# EAGLE board Cansat-2023-3 (EAGLE 9.4.2)
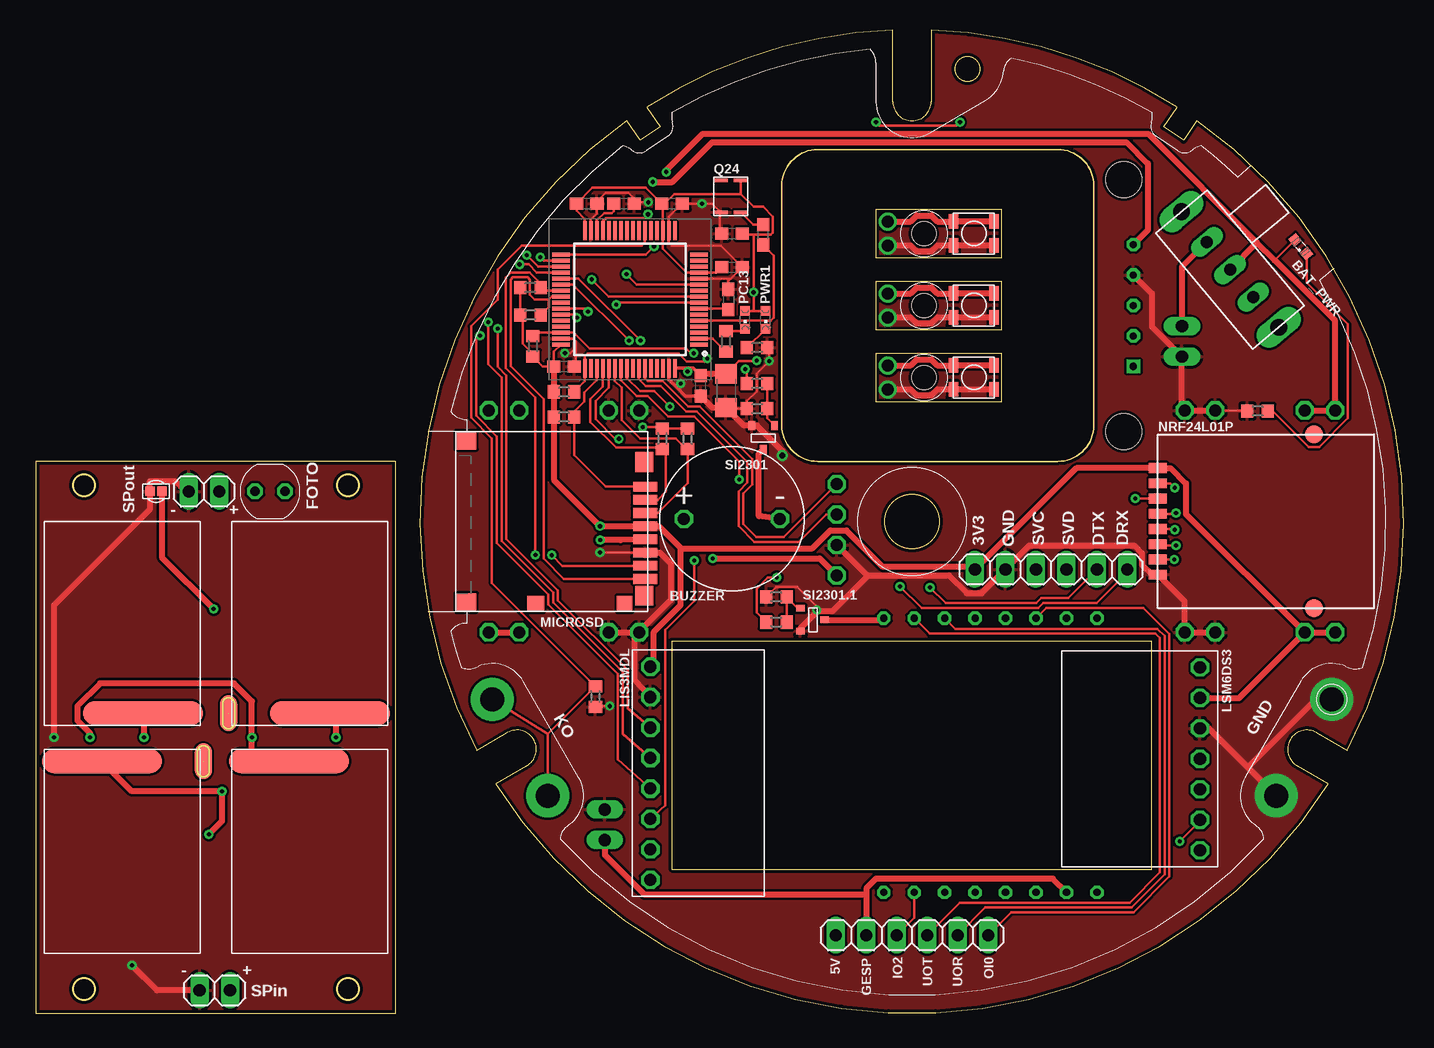
[diagram p0: board, top side]
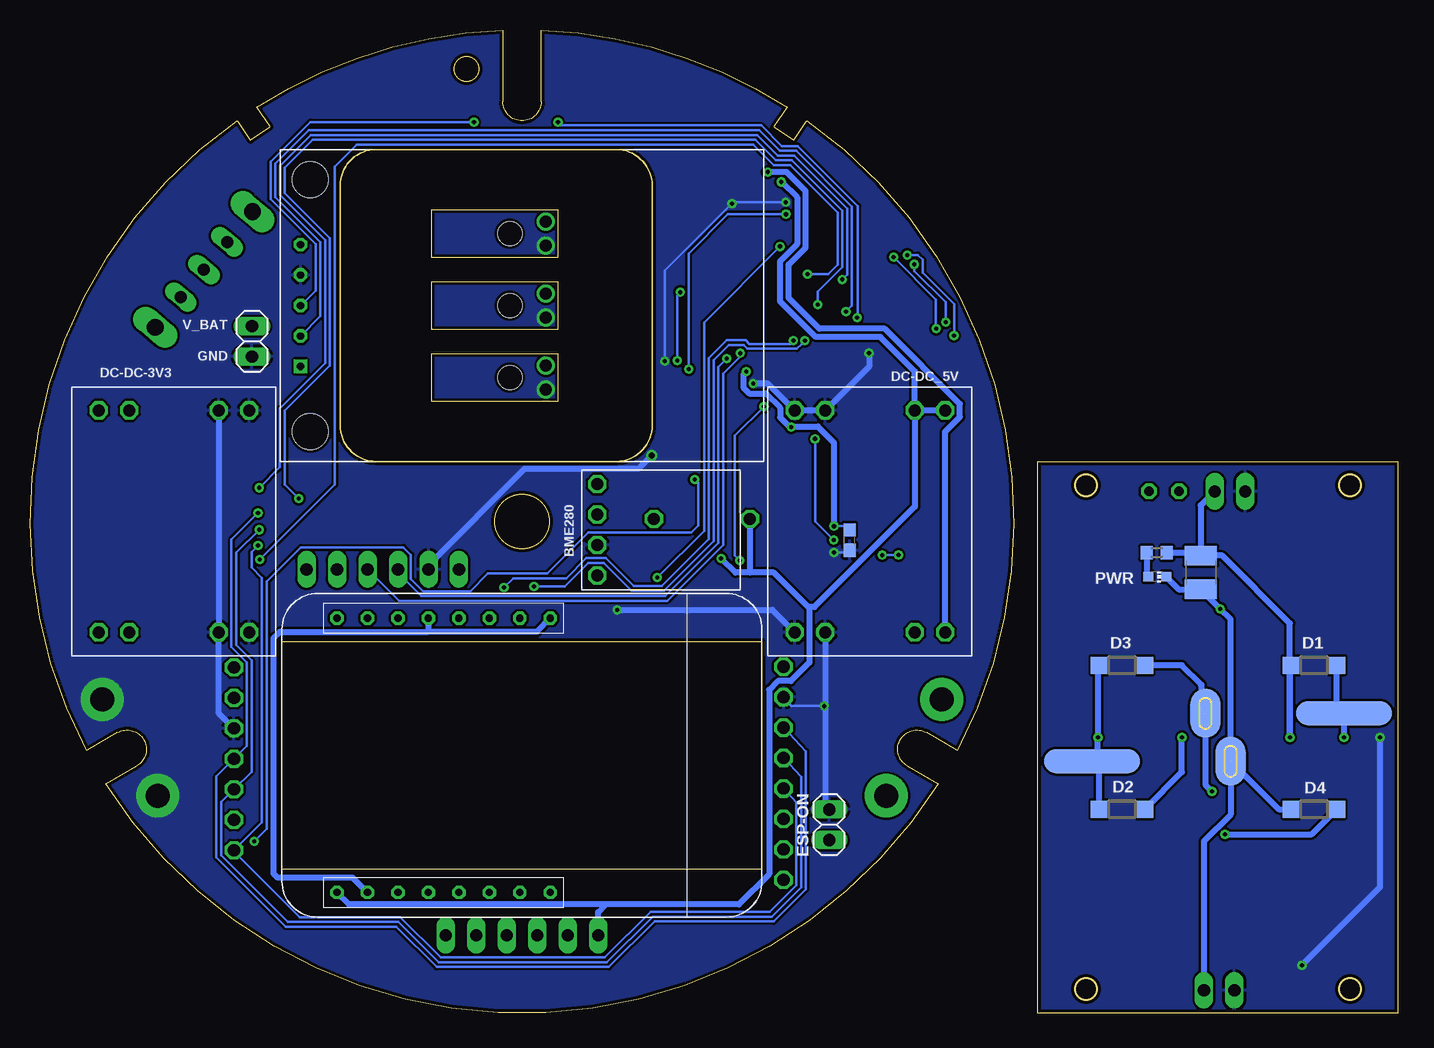
[diagram p1: board, bottom side, seen from below]

Size 114 x 81.97 mm. Coordinates in mm from the lower left corner, seen from the top.
Outline: 0,0 30,0 30,46 0,46 0,0
Outline: 80.5,51 80.5,55 70,55 70,51 80.5,51
Outline: 80.5,63 80.5,67 70,67 70,63 80.5,63
Outline: 80.5,57 80.5,61 70,61 70,57 80.5,57
Outline: 52.02,73.89 50.36,72.77 49.25,74.42 arc82 36.72,21.9 39.29,23.39 arc-180 40.89,20.61 38.32,19.13 arc116 107.68,19.13 105.11,20.61 arc-180 106.71,23.39 109.28,21.9 arc82 96.75,74.42 95.64,72.77 93.98,73.89 95.09,75.54 arc30 74.6,81.97 74.6,76 arc-180 71.4,76 71.4,81.97 arc30 50.91,75.54 52.02,73.89
Outline: 53,12 93,12 93,31 53,31 53,12
Outline: circle at 4,2 radius 0.9
Outline: circle at 26,2 radius 0.9
Outline: circle at 26,44 radius 0.9
Outline: circle at 4,44 radius 0.9
Outline: circle at 73,41 radius 2.25
Outline: circle at 77.63,78.72 radius 1
Copper layers (1*16): Top 0.035mm / dielectric 1.5mm / Bottom 0.035mm
Design rules "default *": minimum track width 0.2mm, minimum drill 0.35mm, track to track 0.2mm, track to pad 0.2mm, pad to pad 0.2mm, via to via 0.2mm, smd to smd 0.2mm, copper to edge 0.25mm, drill to drill 0.1mm, minimum pad ring 10mil, minimum via ring 8mil, stop-mask expansion 3mil, vias tented up to drill 0mil, thermal gap 10mil
Holes 2 mm at 74,53 74,65 74,59

## Footprints (pad centres in the part's own frame; a part is rotated, then mirrored left to right if it is on the bottom)
SML0603 = smd 0.8 x 0.8: A 0.75,0; C -0.75,0
BME280-PINS-ONLY = drill 1.016 octagon: P$1 -3.81,5.33; P$2 -1.27,5.33; P$3 1.27,5.33; P$4 3.81,5.33
BUZZER-S8R12 = drill 1 octagon: P$1 -4,0; P$2 4,0
C1210 = smd 1.6 x 2.7: 1 -1.4,0; 2 1.4,0
C0603 = smd 1.1 x 1: 1 -0.85,0; 2 0.85,0
C1206 = smd 1.6 x 1.8: 1 -1.4,0; 2 1.4,0
SOD123 = smd 1.4 x 1.4: A 1.9,0; C -1.9,0
MP1584-B = drill 1.016 octagon: P$1 1.95,2.23; P$2 1.95,4.77; P$3 1.95,12.23; P$4 1.95,14.77; P$5 20.45,14.77; P$6 20.45,12.23; P$7 20.45,4.77; P$8 20.45,2.23
ESP32-CAM = drill 0.6 octagon: P$1 -11.43,-15.42; P$2 -11.43,-12.88; P$3 -11.43,-10.34; P$4 -11.43,-7.8; P$5 -11.43,-5.26; P$6 -11.43,-2.72; P$7 -11.43,-0.18; P$8 -11.43,2.36; P$9 11.43,-15.42; P$10 11.43,-12.88; P$11 11.43,-10.34; P$12 11.43,-7.8; P$13 11.43,-5.26; P$14 11.43,-2.72; P$15 11.43,-0.18; P$16 11.43,2.36
1X02 = drill 1.016 long: 1 -1.27,0; 2 1.27,0
VT93N1-VERT = drill 0.8 octagon: P$1 -1.25,0; P$2 1.25,0
1X06 = drill 1.016 long: 1 -6.35,0; 2 -3.81,0; 3 -1.27,0; 4 1.27,0; 5 3.81,0; 6 6.35,0
LIS3MDL-CGMSU-NB2023-1 = drill 1.016 octagon: P$1 -8.89,-4; P$2 -6.35,-4; P$3 -3.81,-4; P$4 -1.27,-4; P$5 1.27,-4; P$6 3.81,-4; P$7 6.35,-4; P$8 8.89,-4
LSM6DS3-GY-NB2023-1 = drill 1.016 octagon: P$1 -7.62,-5; P$2 -5.08,-5; P$3 -2.54,-5; P$4 0,-5; P$5 2.54,-5; P$6 5.08,-5; P$7 7.62,-5
SD = smd 0.8 x 2: CLK 6,-15.77; CMD 8.2,-15.77; DAT0 3.8,-15.77; DAT1 2.7,-15.77; DAT2 10.4,-15.77; DAT3 9.3,-15.77; VDD 7.1,-15.77; VSS 4.9,-15.77 | smd 1.5 x 1.7: P$9 0.75,-0.85; P$13 14.25,-0.85 | smd 1.6 x 1.5: P$10 1.3,-15.7 | smd 1.29 x 1.3: P$11 0.645,-14.05 | smd 1.29 x 1.4: P$12 0.645,-6.65 | smd 1.7 x 1.5: P$14 12.45,-15.7
NRF24L01_ML01SP4 = smd 1.5 x 0.8: P$1 -9,4.445; P$2 -9,3.175; P$3 -9,1.905; P$4 -9,0.635; P$5 -9,-0.635; P$6 -9,-1.905; P$7 -9,-3.175; P$8 -9,-4.445 | smd 1.5 x 1.5: P$9 4,7.25; P$10 4,-7.25
CHIPLED_0603 = smd 0.8 x 0.8: A 0,-0.75; C 0,0.75
CHIP-LED0603 = smd 0.8 x 0.8: A 0,-0.75; C 0,0.75
Q24 = smd 0.3 x 1.2: P$1 -1.325,-0.85; P$2 1.325,-0.85; P$3 1.325,0.85; P$4 -1.325,0.85
R0603 = smd 1 x 1.1: 1 -0.85,0; 2 0.85,0
SWITCH_SK-12F14 = drill 1.4 long: P$1 0.006,6.3; P$2 0.006,-6.3 | drill 1 long: P$3 0.006,0; P$4 0.006,-3; P$5 0.006,3
SOT23-3 = smd 0.56 x 0.73: 1 -0.95,-1; 2 0.95,-1; 3 0,1
QFP50P1200X1200X160-64N = smd 1.475 x 0.27: 1 -5.738,3.75; 2 -5.738,3.25; 3 -5.738,2.75; 4 -5.738,2.25; 5 -5.738,1.75; 6 -5.738,1.25; 7 -5.738,0.75; 8 -5.738,0.25; 9 -5.738,-0.25; 10 -5.738,-0.75; 11 -5.738,-1.25; 12 -5.738,-1.75; 13 -5.738,-2.25; 14 -5.738,-2.75; 15 -5.738,-3.25; 16 -5.738,-3.75; 33 5.738,-3.75; 34 5.738,-3.25; 35 5.738,-2.75; 36 5.738,-2.25; 37 5.738,-1.75; 38 5.738,-1.25; 39 5.738,-0.75; 40 5.738,-0.25; 41 5.738,0.25; 42 5.738,0.75; 43 5.738,1.25; 44 5.738,1.75; 45 5.738,2.25; 46 5.738,2.75; 47 5.738,3.25; 48 5.738,3.75 | smd 0.27 x 1.475: 17 -3.75,-5.738; 18 -3.25,-5.738; 19 -2.75,-5.738; 20 -2.25,-5.738; 21 -1.75,-5.738; 22 -1.25,-5.738; 23 -0.75,-5.738; 24 -0.25,-5.738; 25 0.25,-5.738; 26 0.75,-5.738; 27 1.25,-5.738; 28 1.75,-5.738; 29 2.25,-5.738; 30 2.75,-5.738; 31 3.25,-5.738; 32 3.75,-5.738; 49 3.75,5.738; 50 3.25,5.738; 51 2.75,5.738; 52 2.25,5.738; 53 1.75,5.738; 54 1.25,5.738; 55 0.75,5.738; 56 0.25,5.738; 57 -0.25,5.738; 58 -0.75,5.738; 59 -1.25,5.738; 60 -1.75,5.738; 61 -2.25,5.738; 62 -2.75,5.738; 63 -3.25,5.738; 64 -3.75,5.738
SOLAR_1-2 = smd 2 x 10: IN-2 -7.5,-1.7 | smd 2 x 8 bottom: OUT -7.5,2.7
SOLAR_0-2 = smd 2 x 10: IN-2 -7.5,-1.7 | smd 4.1 x 2.5 bottom: OUT-2 -7.5,6.75 | smd 3 x 1.4: OUT-21 -7.5,6.75
GPS_NEO7M_W-PPS_&_ANT = drill 0.6 octagon: GND -18.45,2.54; RX -18.45,-2.54; TX -18.45,0; VCC -18.45,5.08 | drill 0.6 square: PPS -18.45,-5.08 | hole 3: -17.65,10.5; -17.65,-10.5
BTN-VS-CUT = smd 0.8 x 1.2: P$1 -1.7,1; P$2 1.7,1; P$3 1.7,-1; P$4 -1.7,-1
VIAS-CONNECT = smd 0.8 x 0.8: 1 -0.5,0; 2 0.5,0

## Placement (x,y rotation side)
BAT_PWR  [SML0603]  105.4,63.9 130 top
BME280  BME280BME280-PINS-ONLY  [BME280-PINS-ONLY]  61.4,40.3 90 bottom
BUZZER  BUZZERS8R6  [BUZZER-S8R12]  58,41.2 0 top
C1  47u  [C1210]  16.44,36.74 270 bottom
C2  100nF  [C0603]  44,53.9 180 top
C3  10uF  [C1206]  57.5,51.9 270 top
C4  100nF  [C0603]  55.4,52.3 90 top
C5  100nF  [C0603]  58,62.2 0 top
C6  100nF  [C0603]  53,67.5 0 top
C7  100nF  [C0603]  45.9,67.5 0 top
C8  100nF  [C0603]  45.7,39.44 90 bottom
C9  1nF  [C0603]  60.6,64.9 90 top
C10  10nF  [C0603]  58,65 0 top
C11  100nf  [C0603]  57.7,59.5 270 top
C12  4.7uf  [C0603]  49,67.5 0 top
D1  MBR0520LT  [SOD123]  7,29 180 bottom
D2  MBR0520LT  [SOD123]  23,17 0 bottom
D3  MBR0520LT  [SOD123]  23,29 180 bottom
D4  MBR0520LT  [SOD123]  7,17 0 bottom
DC-DC-3V3  MP1584-B  [MP1584-B]  110.5,52.2 270 bottom
DC-DC_5V  MP1584-B  [MP1584-B]  35.5,29.8 90 bottom
ESP32-CAM  ESP32-CAM  [ESP32-CAM]  73,21.5 90 top
ESP-ON  [1X02]  47.4,15.7 270 bottom
FOTO  VT93N1VERT  [VT93N1-VERT]  19.5,43.5 0 top
JP1  [1X02]  14,43.5 0 top
JP2  [1X06]  84.6,37 180 top
JP3  [1X02]  95.5,56 270 bottom
JP4  [1X06]  73,6.5 0 top
LIS3MDL  LIS3MDL-CJMCUбез_отв.  [LIS3MDL-CGMSU-NB2023-1]  55.2,20 270 top
LSM6DS3  LSM6DS3-GY-NB2023Без_отв.  [LSM6DS3-GY-NB2023-1]  92,21.2 90 top
MICROSD  SD  [SD]  35,33.5 90 top
NRF24L01P  NRF24L01_ML01SP4  [NRF24L01_ML01SP4]  102.5,41 0 top
PC13  [CHIPLED_0603]  59.1,57.8 180 top
PWR  [CHIP-LED0603]  20.06,36.37 270 bottom
PWR1  [CHIPLED_0603]  60.8,57.8 180 top
Q24  Q24  [Q24]  57.9,68.1 270 top
R1  2k7  [R0603]  20.1,38.39 180 bottom
R2  3k3  [R0603]  44,49.7 180 top
R3  2k  [R0603]  60.1,55.5 180 top
R4  2k  [R0603]  57.5,56 90 top
R5  10k  [R0603]  41.4,55.6 270 top
R6  10k  [R0603]  44,51.8 180 top
R7  3k3  [R0603]  52.2,47.9 90 top
R8  3k3  [R0603]  54.3,47.9 90 top
R9  3k3  [R0603]  41.2,60.5 180 top
R10  3k3  [R0603]  41.2,58.2 180 top
R11  5K1  [R0603]  101.8,50.2 180 top
R30  100R  [R0603]  60.1,52.5 0 top
R31  10k  [R0603]  60.1,50.4 180 top
R32  10k  [R0603]  46.62,26.4 90 top
R33  10k  [R0603]  61.7,34.7 0 top
R34  100R  [R0603]  61.7,32.6 0 top
S1  [SWITCH_SK-12F14]  99.5,62 40 top
SI2301  MOSFET-N  [SOT23-3]  60.6,48 180 top
SI2301.1  MOSFET-N  [SOT23-3]  64.7,32.8 270 top
SP-OUT  [1X02]  14.9,1.9 180 top
STM32F0401  STM32F401RCT6  [QFP50P1200X1200X160-64N]  49.5,59.5 180 top
U$1  SOLAR-2_1  [SOLAR_1-2]  7.2,32.5 90 top
U$2  SOLAR-2_1  [SOLAR_1-2]  22.8,13.5 270 top
U$3  SOLAR-2_0  [SOLAR_0-2]  22.8,32.5 90 top
U$4  SOLAR-2_0  [SOLAR_0-2]  7.2,13.5 270 top
U$5  GPS_NEO7M_W-PPS  [GPS_NEO7M_W-PPS_&_ANT]  73,59 0 bottom
U$6  BTN_VERY_SMALLCUT  [BTN-VS-CUT]  78.15,53 180 top
U$7  [VIAS-CONNECT]  10,43.5 180 top
U$8  BTN_VERY_SMALLCUT  [BTN-VS-CUT]  78.15,65 180 top
U$9  BTN_VERY_SMALLCUT  [BTN-VS-CUT]  78.15,59 180 top

## Library data of the parts
BAT_PWR PC13 PWR PWR1 = led
BME280 BUZZER DC-DC-3V3 DC-DC_5V ESP32-CAM LIS3MDL LSM6DS3 MICROSD NRF24L01P S1 SI2301 SI2301.1 U$5 U$6 U$8 U$9 = NEON-BLADE-2023
C1-C12 = rcl; SPICEPREFIX: C
D1-D4 = diode
ESP-ON JP1-JP4 SP-OUT = pinhead
FOTO U$1-U$4 U$7 = KNPN-2023
Q24 = CanCubeSat
R1-R11 R30-R34 = rcl; SPICEPREFIX: R
STM32F0401 = STM32F401RCT6; ARROW_PART_NUMBER: STM32F401RCT6; ARROW_PRICE-STOCK: https://www.arrow.com/en/products/stm32f401rct6/stmicroelectronics?region=nac; DESCRIPTION: 32-Bit MCU Cortex-M4 256KB 1.8V LQFP64 STMicroelectronics STM32F401RCT6, 32bit ARM Cortex M4 MCU, 84MHz, 256 kB Flash, 64-Pin LQFP; HEIGHT: 1.6mm; MANUFACTURER_NAME: STMicroelectronics; MANUFACTURER_PART_NUMBER: STM32F401RCT6; MOUSER_PART_NUMBER: 511-STM32F401RCT6; MOUSER_PRICE-STOCK: https://www.mouser.co.uk/ProductDetail/STMicroelectronics/STM32F401RCT6?qs=DqCdCwOw4%2F4JITyspz8omA%3D%3D

## Nets
3V3: C2.2 C3.1 C4.2 C5.1 C6.1 C7.1 C8.2 C10.2 DC-DC-3V3.P$7 DC-DC-3V3.P$8 JP2.6 LIS3MDL.P$1 LSM6DS3.P$6 MICROSD.VDD NRF24L01P.P$1 PC13.A PWR1.A Q24.P$4 R2.2 R5.2 R6.2 R7.2 R8.2 R9.2 R10.2 STM32F0401.13 STM32F0401.19 STM32F0401.32 STM32F0401.48 STM32F0401.64
5V: BME280.P$1 BUZZER.P$1 DC-DC_5V.P$7 DC-DC_5V.P$8 ESP32-CAM.P$1 JP4.1 U$5.VCC
BASS_BUZZER: R30.1 STM32F0401.29
CE_NRF: NRF24L01P.P$2 STM32F0401.9
CS_LIS: LIS3MDL.P$6 STM32F0401.56
CS_LSM: LSM6DS3.P$2 STM32F0401.55
CS_NRF: NRF24L01P.P$3 STM32F0401.8
DBG_RX: JP2.1 STM32F0401.38
DBG_TX: JP2.2 STM32F0401.37
ESP_EN: R34.1 STM32F0401.33
GND: BME280.P$2 C2.1 C3.2 C4.1 C5.2 C6.2 C7.2 C8.1 C10.1 C11.1 C12.2 DC-DC-3V3.P$3 DC-DC-3V3.P$4 DC-DC-3V3.P$5 DC-DC-3V3.P$6 DC-DC_5V.P$3 DC-DC_5V.P$4 DC-DC_5V.P$5 DC-DC_5V.P$6 ESP-ON.1 JP2.5 JP3.2 LIS3MDL.P$2 LSM6DS3.P$5 MICROSD.VSS NRF24L01P.P$8 Q24.P$2 R3.1 R11.2 R31.2 R32.1 R33.1 SI2301.1.2 SI2301.2 STM32F0401.12 STM32F0401.18 STM32F0401.31 STM32F0401.47 STM32F0401.63 U$5.GND
GND_ESP: ESP32-CAM.P$2 ESP32-CAM.P$12 ESP32-CAM.P$16 ESP-ON.2 JP4.2 SI2301.1.3
GPS_RX: STM32F0401.43 U$5.TX
GPS_TX: STM32F0401.42 U$5.RX
IO0: ESP32-CAM.P$11 JP4.6
IO2: ESP32-CAM.P$7 JP4.3
KO: R32.2 STM32F0401.22
LED: R4.1 STM32F0401.2
MISO: LIS3MDL.P$5 LSM6DS3.P$1 NRF24L01P.P$6 STM32F0401.35
MOSI: LIS3MDL.P$4 LSM6DS3.P$3 NRF24L01P.P$5 STM32F0401.36
N$1: D1.C D2.A U$1.OUT U$2.IN-2
N$2: D2.C D3.A U$2.OUT U$3.IN-2
N$3: D3.C D4.A U$3.OUT-2 U$3.OUT-21 U$4.IN-2
N$4: PWR.A R1.2
N$5: R33.2 R34.2 SI2301.1.1
N$6: R30.2 R31.1 SI2301.1
N$7: JP3.1 S1.P$5
N$8: BAT_PWR.C R11.1
N$10: C9.2 Q24.P$3
N$12: C12.1 STM32F0401.30
N$20: BUZZER.P$2 SI2301.3
N$36: PWR1.C R3.2
N$37: PC13.C R4.2
NRF_IRQ: NRF24L01P.P$7 STM32F0401.11
NRST: C11.2 STM32F0401.7
P1: U$6.P$1 U$6.P$2
P2: U$6.P$3 U$6.P$4
P3: U$8.P$1 U$8.P$2
P4: U$8.P$3 U$8.P$4
P5: U$9.P$1 U$9.P$2
P6: U$9.P$3 U$9.P$4
SCK: LIS3MDL.P$3 LSM6DS3.P$4 NRF24L01P.P$4 STM32F0401.34
SCL: BME280.P$3 STM32F0401.58
SDA: BME280.P$4 STM32F0401.59
SDIO_CK: MICROSD.CLK STM32F0401.53
SDIO_CMD: MICROSD.CMD R8.1 STM32F0401.54
SDIO_DAT0: MICROSD.DAT0 R9.1 STM32F0401.39
SDIO_DAT1: MICROSD.DAT1 R10.1 STM32F0401.40
SDIO_DAT2: MICROSD.DAT2 R2.1 STM32F0401.51
SDIO_DAT3: MICROSD.DAT3 R7.1 STM32F0401.52
SP+: C1.1 D1.A JP1.2 R1.1 U$1.IN-2
SP+-: C1.2 D4.C PWR.C SP-OUT.1 U$4.OUT-2 U$4.OUT-21 U$7.1
SP-: JP1.1 SP-OUT.2 U$7.2
SVC: JP2.4 R6.1 STM32F0401.49
SVD: JP2.3 R5.1 STM32F0401.46
TCXO: C9.1 STM32F0401.5
UOR: ESP32-CAM.P$14 JP4.5
UOT: ESP32-CAM.P$15 JP4.4
V_BAT: BAT_PWR.A DC-DC-3V3.P$1 DC-DC-3V3.P$2 DC-DC_5V.P$1 DC-DC_5V.P$2 S1.P$3

## Tracks (layer width: path | path; a pad name or v marks a point on that pad's centre or on a via)
3V3  (via drill 0.35)
  Top 0.2: C6.1 50.83,68.83 46.38,68.83 C7.1 45.05,66.9 45.75,66.2 STM32F0401.32 | C6.1 52.25,67.4 STM32F0401.19 52.25,63.75 54.25,61.75 STM32F0401.13 56.7,61.75 C5.1 | C6.1 52.38,67.5 53.18,68.3 58.73,68.3 58.75,68.28 | 59.8,64.9 61.22,64.9 61.4,65.08 61.4,66.42 60.6,67.22 59.8,67.22 58.75,68.28 | PC13.A 59.8,58.55 | 59.8,58.55 PWR1.A | 59.8,58.55 v59.8,60.1 59.8,64.9 | R9.2 R10.2 40.55,58 40.55,55.83 41.4,54.98 R5.2 42.25,53.9 C2.2 43.15,55.14 STM32F0401.48 | Q24.P$4 58.75,68.28 | v50.55,48.86 52.09,48.86 R7.2 R8.2 | v60.07,54.4 60.05,54.38 58.58,54.38 C3.1 | 59.8,64.9 58.95,64.9 C10.2
  Top 0.28: STM32F0401.64 54.3,53.76 | 54.3,53.76 54.79,53.76 C4.2 | v54.3,53.5 54.3,53.76
  Top 0.5: DC-DC-3V3.P$7 DC-DC-3V3.P$8 | DC-DC-3V3.P$7 95.83,41.6 95.83,44.17 94.56,45.45 NRF24L01P.P$1 86.69,45.45 JP2.6 78.05,37.2 70.57,37.2 67.53,40.24 66.2,40.24 64.7,38.74 53.76,38.74 53.7,38.81 | C2.2 R6.2 R2.2 43.15,44.45 v47,40.6 MICROSD.VDD 51.91,40.6 53.7,38.81 | C3.1 55.55,53.3 C4.2 | 53.7,38.81 53.7,34 51.48,31.78 51.48,29.17 LIS3MDL.P$1 | DC-DC-3V3.P$7 100.26,26.28 LSM6DS3.P$6
  Bottom 0.2: v60.07,54.4 60.07,59.83 v59.8,60.1 | C8.2 46.01,40.6 v47,40.6 | v50.55,48.86 50.6,48.91
  Bottom 0.5: v54.3,53.5 54.55,53.25 54.55,52.16 54.06,51.67 52.68,51.67 51.48,50.47 51.48,49.67 50.72,48.91 50.6,48.91 48.34,48.91 47,47.57 v47,40.6
5V  (via drill 0.35)
  Top 0.5: v51.4,69.3 53.04,69.3 56.35,72.61 90.88,72.61 92.66,70.83 92.66,65.29 U$5.VCC | v56.41,37.91 65.31,37.91 BME280.P$1
  Bottom 0.5: DC-DC_5V.P$8 DC-DC_5V.P$7 | v51.4,69.3 51.35,69.3 50.07,68.02 50.07,64.1 51.5,62.67 51.5,59.35 48.51,56.37 43.14,56.37 40.27,53.5 DC-DC_5V.P$7 | ESP32-CAM.P$1 87.42,9.07 66,9.07 | 66,9.07 54.93,9.07 52.41,11.59 52.41,26.95 51.69,27.68 50.6,27.68 49.04,29.23 49.04,33.76 49.14,33.86 | 49.14,33.86 52.01,36.72 54,36.72 | v56.41,37.91 56.38,37.91 55.19,36.72 54,36.72 | 66,9.07 66.65,8.42 JP4.1 | 49.14,33.86 48.64,33.86 40.27,42.23 DC-DC_5V.P$7 | BUZZER.P$1 54,36.72
BASS_BUZZER  (via drill 0.35)
  Top 0.2: v51,66.6 50.7,66.3 48,66.3 47.52,66.3 47.25,66.03 STM32F0401.29 | R30.1 59.25,53.55 v59.1,53.7
  Bottom 0.2: v59.1,53.7 59.1,63.33 55.83,66.6 v51,66.6
CE_NRF  (via drill 0.35)
  Top 0.2: STM32F0401.9 47.73,59.75 v46.31,61.17 | NRF24L01P.P$2 94.52,44.17 v94.89,43.8
  Bottom 0.2: v46.31,61.17 45.9,61.58 45.9,67.07 50.33,71.5 51.7,71.5 53.41,73.21 90.59,73.21 93.15,70.65 93.15,68.2 89.4,64.45 89.4,54.2 93.18,50.42 93.18,45.51 v94.89,43.8
CS_LIS  (via drill 0.35)
  Top 0.2: STM32F0401.56 49.25,52.95 50.34,51.86 51.54,51.86 v52.83,50.57 | LIS3MDL.P$6 52.43,17.32 52.43,31.95 54.85,34.37 v54.85,37.75
  Bottom 0.2: v52.83,50.57 55.25,48.15 55.25,38.15 v54.85,37.75
CS_LSM  (via drill 0.35)
  Top 0.2: STM32F0401.55 48.75,52.78 50.07,51.46 50.98,51.46 52.69,49.75 54.85,49.75 58.61,45.99 v58.61,44.5 | v95.31,14.31 97,16 LSM6DS3.P$2
  Bottom 0.2: v95.31,14.31 94.27,15.35 94.27,35.99 91.43,38.82 82.89,38.82 82.27,38.2 82.27,36.21 81.23,35.18 77.32,35.18 75.84,36.66 70.91,36.66 67.47,40.09 58.91,40.09 58.33,40.67 58.33,44.22 v58.61,44.5
CS_NRF  (via drill 0.35)
  Top 0.2: STM32F0401.8 48.52,59.25 v48.35,59.07 | v91.61,42.9 NRF24L01P.P$3
  Bottom 0.2: v48.35,59.07 48.35,60.15 46.3,62.2 46.3,66.9 50.5,71.1 51.87,71.1 53.58,72.81 90.42,72.81 92.75,70.48 92.75,68.36 89,64.61 89,54 92.78,50.22 92.78,44.06 v91.61,42.9
DBG_RX  (via drill 0.35)
  Top 0.2: STM32F0401.38 44.75,60.75 v49.42,56.08 | JP2.1 90.95,36.75 88.4,34.2 83.94,34.2 83.53,33.78 73.79,33.78 v72,35.58
  Bottom 0.2: v49.42,56.08 49.7,55.8 50.1,55.4 54.24,55.4 54.54,55.7 55.77,55.7 57.03,54.44 57.03,39.38 61.2,35.2 63.84,35.2 66.19,37.55 67.47,37.55 69.44,35.58 v72,35.58
DBG_TX  (via drill 0.35)
  Top 0.2: STM32F0401.37 45.21,61.25 v50.38,56.08 | JP2.2 88.41,36.98 86.03,34.6 83.78,34.6 83.36,34.18 75.82,34.18 v74.5,35.5
  Bottom 0.2: v50.38,56.08 50.66,55.8 54.08,55.8 54.37,56.1 55.94,56.1 57.43,54.6 57.43,39.54 61.37,35.6 63.68,35.6 66.02,37.95 67.64,37.95 69.33,36.26 73.74,36.26 v74.5,35.5
ESP_EN  (via drill 0.35)
  Top 0.2: STM32F0401.33 50.83,63.25 v51.5,63.92 | R34.1 60.05,33.4 60.05,35.37 60.99,36.31 v61.72,36.31
  Bottom 0.2: v61.72,36.31 57.83,40.2 57.83,57.59 v51.5,63.92
GND  (via drill 0.35, 0.5, 2 pad 3.6)
  Top 0.2: v51.02,67.6 49.95,67.6 C12.2 49.85,67.9 49.35,68.4 47.5,68.4 46.75,67.65 C7.2 46.75,66.67 46.25,66.17 STM32F0401.31 | STM32F0401.12 57.9,61.25 | 57.9,61.25 C5.2 57.05,64 53,64 52.75,64.25 STM32F0401.18 52.75,66.4 C6.2 v55.5,67.5 56.33,67.5 Q24.P$2 57,66.72 57,65.15 C10.1 | C11.1 57.7,61.05 57.9,61.25 | STM32F0401.47 44.75,56.25 45,56 45,55.5 | 45,55.5 45,54.05 C2.1 | 50.5,32.03 50.48,32.02 | 45,55.5 44.54,55.04 v44.08,55.04 | R32.1 46.67,25.6 v47.82,25.6 | MICROSD.VSS v47,38.4 | R33.1 61.7,35.55 63.43,35.55 65.06,33.92 v65.06,33.62 65.15,33.53 | C3.2 57.6,50.4 R31.2 59.25,51.03 60.05,51.83 60.05,53.31 v61.11,54.37 61.11,55.34 R3.1 | DC-DC-3V3.P$3 100.9,50.25 R11.2
  Top 0.28: STM32F0401.63 52.75,52.81 53.38,52.18 | C4.1 54.11,51.45 53.38,52.18 | v53.72,52.5 53.4,52.18 53.38,52.18
  Top 0.5: DC-DC-3V3.P$6 DC-DC-3V3.P$5 95.73,34.33 NRF24L01P.P$8 92.98,36.55 92.16,37.38 92.16,38.36 91.55,38.97 82.76,38.97 JP2.5 78.82,35.03 77.55,35.03 76.07,36.5 69.35,36.5 | LSM6DS3.P$5 97.74,23.74 100.99,20.49 | v103.35,18.13 100.99,20.49 | DC-DC_5V.P$3 DC-DC_5V.P$4 50.48,32.02 | DC-DC-3V3.P$3 DC-DC-3V3.P$4 95.5,50.43 JP3.2 93,57.23 93,59.99 U$5.GND | MICROSD.VSS 52,38.4 52.9,37.5 52.9,34.43 50.5,32.03 49.9,31.43 49.9,27.76 LIS3MDL.P$2 | BME280.P$2 69.26,36.5 69.35,36.5 | 69.35,36.5 66.38,33.53 65.15,33.53 63.7,32.08 SI2301.1.2 | C4.1 56.35,50.5 C3.2 59,49 SI2301.2 60.08,49 62.2,46.88 v62.2,46.5 | 100.99,20.49 106.65,26.15 v107.98,26.15
  Bottom 0.2: v51.02,67.6 55.4,67.6 v55.5,67.5 61.11,61.89 v61.11,54.37 | C8.1 45.89,38.4 v47,38.4 | LIS3MDL.P$2 50.55,25.6 v47.82,25.6
  Bottom 0.5: DC-DC-3V3.P$3 DC-DC-3V3.P$6 98.27,25.01 LSM6DS3.P$5 | v62.2,46.5 63.33,45.37 72.8,45.37 80.79,37.38 JP2.5 | v53.72,52.5 52.52,52.5 DC-DC_5V.P$5 DC-DC_5V.P$6 44.08,53.9 v44.08,55.04 | DC-DC_5V.P$4 52.14,33.62 v65.06,33.62 | DC-DC_5V.P$3 47.73,17.3 ESP-ON.1
  pour Bottom (rank 2): 31.3,82.6 31.3,-0.6 114.7,-0.6 114.7,82.6
  pour Top (rank 2): 31.6,82.2 114.3,82.2 114.3,-0.2 31.6,-0.2
GND_ESP
  Top 0.5: SI2301.1.3 70.51,32.8 ESP32-CAM.P$16 | ESP32-CAM.P$2 84.75,11.2 70,11.2 69.19,10.39 69.19,9.9 | 69.19,9.9 JP4.2 | ESP-ON.2 47.4,13.2 50.7,9.9 69.19,9.9
  Bottom 0.5: ESP32-CAM.P$2 87.11,11.3 93.37,11.3 93.7,11.63 93.7,31.27 93.17,31.8 80.8,31.8 | ESP32-CAM.P$16 71.77,31.8 80.8,31.8 | ESP32-CAM.P$12 80.8,31.8
GPS_RX  (via drill 0.35)
  Top 0.2: STM32F0401.43 44.83,58.25 v45.08,58 | v77,74.29 76.71,74 70.29,74 v70,74.29
  Bottom 0.2: v45.08,58 45,58.08 45,67.3 50,72.3 51.37,72.3 53.08,74.01 69.72,74.01 v70,74.29 | U$5.TX 90.2,60.25 90.2,64.11 93.95,67.86 93.95,70.98 90.64,74.29 v77,74.29
GPS_TX  (via drill 0.35)
  Top 0.2: STM32F0401.42 45.75,58.75 v46,58.5
  Bottom 0.2: v46,58.5 45.5,59 45.5,67.23 50.17,71.9 51.53,71.9 53.25,73.61 90.75,73.61 93.55,70.82 93.55,68.03 89.8,64.28 89.8,58.11 U$5.RX
IO0
  Top 0.2: ESP32-CAM.P$11 84.19,33.78 92.27,33.78 94.45,31.6 94.45,11.4 91.47,8.42 81.27,8.42 JP4.6
IO2
  Top 0.2: ESP32-CAM.P$7 73.18,8 73.18,7.95 JP4.3
KO  (via drill 2 pad 3.6)
  Top 0.2: STM32F0401.22 50.75,64.25 50.5,64 40.5,64 38.5,62 38.5,59.5 36.27,57.27 36.27,49.64 38,47.91 38,35.87 R32.2 42.65,23.28 | v42.65,18.13 42.65,23.28 | 42.65,23.28 v38.02,26.15
LED
  Top 0.2: STM32F0401.2 56.4,56.25 R4.1
MISO  (via drill 0.35)
  Top 0.2: STM32F0401.35 41.86,62.25 v40.9,63.21 | LIS3MDL.P$5 48.5,21.16 48.5,28.27 42.7,34.07 42.7,34.9 38.4,39.2 38.4,48.08 36.67,49.81 36.67,56.17 v37,56.5 | v95,39 93.59,39 NRF24L01P.P$6
  Bottom 0.2: v40.9,63.21 40,63.21 39.6,62.8 39.6,61.73 37,59.13 v37,56.5 | LIS3MDL.P$5 50.14,17.56 50.14,10.67 52.36,8.45 62.29,8.45 66.09,4.65 79.78,4.65 83.13,8 91.5,8 97,13.5 LSM6DS3.P$1 94.67,15.91 94.67,36.3 95.53,37.17 95.53,38.47 v95,39
MOSI  (via drill 0.35)
  Top 0.2: STM32F0401.36 41.75,61.75 41.07,62.43 v40.3,62.43 | v37.68,57.62 37.68,54.13 38.8,53 38.8,39.37 43.1,35.07 43.1,34.23 48.9,28.43 48.9,23.29 LIS3MDL.P$4 | NRF24L01P.P$5 94.83,40.37 v94.9,40.3
  Bottom 0.2: v40.3,62.43 40.3,61.87 37.7,59.27 37.7,57.65 v37.68,57.62 | v94.9,40.3 96.8,38.4 96.8,30.69 95.54,29.43 95.54,20.12 LSM6DS3.P$3 98.06,17.6 98.06,13.14 92.52,7.6 83.29,7.6 79.94,4.25 65.92,4.25 62.12,8.05 52.19,8.05 49.74,10.5 49.74,19.7 LIS3MDL.P$4
N$1  (via drill 0.35)
  Top 0.5: U$2.IN-2 18,21 v18,23 18,26 16.5,27.5 5.35,27.5 3.45,25.6 3.45,24.4 4.5,23.35 v4.5,23
  Bottom 0.5: D1.C 5.1,25.61 4.75,25.25 U$1.OUT v4.5,23 | D2.A 18,20.1 v18,23
N$2  (via drill 0.35)
  Top 0.5: U$3.IN-2 25,25.04 v25,23
  Bottom 0.5: D2.C 24.9,20.45 U$2.OUT 25,21.72 v25,23 25,28.9 D3.A
N$3  (via drill 0.35)  (1 unrouted)
  Top 0.5: U$4.IN-2 8,18.5 v15.5,18.5 15.5,16 v14.41,14.91
  Bottom 0.5: D3.C 18,29 16.39,27.39 U$3.OUT-21 16.05,19.05 v15.5,18.5 | 5,16.9 D4.A 7.19,14.91 v14.41,14.91
N$4
  Bottom 0.5: R1.2 20.95,36.51 PWR.A
N$5
  Top 0.2: R34.2 R33.2 63.5,33.75 SI2301.1.1
N$6
  Top 0.2: R30.2 R31.1 60.95,49.6 SI2301.1
N$7
  Top 0.5: S1.P$5 95.5,62.23 JP3.1
N$8
  Top 0.2: R11.1 103.06,50.2 106.06,47.2 106.94,47.2 109.33,49.6 109.33,57.45 105.88,60.9 BAT_PWR.C
N$10
  Top 0.2: C9.2 59.77,65.75 Q24.P$3
N$12
  Top 0.2: STM32F0401.30 46.75,66.1 47.35,66.7 48,66.7 48.15,66.85 C12.1
N$20
  Top 0.5: SI2301.3 60.24,46.64 60.24,41.44 BUZZER.P$2
N$36
  Top 0.2: PWR1.C R3.2
N$37
  Top 0.2: R4.2 58.9,56.85 PC13.C
NRF_IRQ  (via drill 0.35)
  Top 0.2: STM32F0401.11 50.07,60.75 v49.21,61.61 | v94.86,37.81 94.84,37.83 NRF24L01P.P$7
  Bottom 0.2: v49.21,61.61 47.49,61.61 46.7,62.4 46.7,66.73 50.67,70.7 52.03,70.7 53.74,72.41 86.77,72.41 88.6,70.58 88.6,44.07 v94.86,37.81
NRST
  Top 0.2: STM32F0401.7 57.6,58.75 C11.2
P1  (via drill 1)
  Top 0.5: v71,52 72.88,52 73.38,51.5 74.62,51.5 75.12,52 U$6.P$2 U$6.P$1
  pour Bottom: 69.1,55.7 81.7,55.7 81.7,50.3 69.1,50.3
  pour Top: 69.7,55.3 80.7,55.3 80.7,50.7 69.7,50.7
P2  (via drill 1)
  Top 0.5: v71,54 72.88,54 73.38,54.5 74.62,54.5 75.12,54 U$6.P$3 U$6.P$4
P3  (via drill 1)
  Top 0.5: v71,64 72.88,64 73.38,63.5 74.62,63.5 75.12,64 U$8.P$2 U$8.P$1
  pour Bottom: 69.1,67.7 81.7,67.7 81.7,62.3 69.1,62.3
  pour Top: 69.7,67.3 80.7,67.3 80.7,62.7 69.7,62.7
P4  (via drill 1)
  Top 0.5: v71,66 72.88,66 73.38,66.5 74.62,66.5 75.12,66 U$8.P$3 U$8.P$4
P5  (via drill 1)
  Top 0.5: v71,58 72.88,58 73.38,57.5 74.62,57.5 75.12,58 U$9.P$2 U$9.P$1
  pour Bottom: 69.1,61.7 81.7,61.7 81.7,56.3 69.1,56.3
  pour Top: 69.7,61.3 80.7,61.3 80.7,56.7 69.7,56.7
P6  (via drill 1)
  Top 0.5: v71,60 72.88,60 73.38,60.5 74.62,60.5 75.12,60 U$9.P$3 U$9.P$4
SCK  (via drill 0.35)
  Top 0.2: STM32F0401.34 42.32,62.75 v42.03,63.03 | v38.47,57.07 38.47,53.9 39.2,53.17 39.2,39.53 43.5,35.23 43.5,35 43.5,34.4 49.3,28.6 49.3,25.41 LIS3MDL.P$3 | v95,41.7 94.94,41.63 NRF24L01P.P$4
  Bottom 0.2: v42.03,63.03 38.5,59.5 38.5,57.09 v38.47,57.07 | v95,41.7 97.21,39.49 97.21,30.53 95.94,29.26 95.94,22.26 LSM6DS3.P$4 98.46,19.74 98.46,12.97 92.69,7.2 83.46,7.2 80.11,3.85 65.75,3.85 61.95,7.65 52.03,7.65 49.34,10.34 49.34,21.84 LIS3MDL.P$3
SCL
  Top 0.2: STM32F0401.58 50.25,52.85 50.8,52.3 52.07,52.3 54.2,50.17 55.07,50.17 59.29,45.95 59.29,44.22 58.55,43.48 58.55,40.6 59.85,39.29 63.57,39.29 65.85,41.57 BME280.P$3
SDA
  Top 0.2: STM32F0401.59 50.75,52.95 51,52.7 52.23,52.7 54.37,50.57 55.31,50.57 59.69,46.19 59.69,44.05 58.95,43.31 58.95,40.76 60.02,39.69 62.31,39.69 BME280.P$4
SDIO_CK  (via drill 0.35)
  Top 0.2: STM32F0401.53 47.75,52.17 46.63,51.05 46.63,49.53 48.28,47.88 v48.58,47.88
  Top 0.5: MICROSD.CLK 48.71,39.44 v47.02,39.44
  Bottom 0.2: v47.02,39.44 48.58,41 v48.58,47.88
SDIO_CMD
  Top 0.2: STM32F0401.54 48.25,52.72 48.8,52.17 48.8,49.47 50.35,47.92 53.33,47.92 54.2,47.05 R8.1 54.3,44.2 51.8,41.7 MICROSD.CMD
SDIO_DAT0  (via drill 0.35)
  Top 0.2: STM32F0401.39 42.3,60.25 R9.1 42.05,60.84 41.14,61.75 39.56,61.75 39.15,61.34 39.15,53.78 41.62,51.31 v41.62,38.2 | MICROSD.DAT0 43.86,37.3 v42.98,38.18
  Bottom 0.2: v42.98,38.18 41.64,38.18 v41.62,38.2
SDIO_DAT1
  Top 0.2: R10.1 42.72,58.87 42.72,59.5 | 42.72,59.5 42.72,59.51 42.97,59.75 STM32F0401.40 | 42.72,59.5 41.58,59.5 41.15,59.93 41.15,61.17 40.97,61.35 39.73,61.35 39.55,61.17 39.55,53.95 42.3,51.2 42.3,37.9 44,36.2 MICROSD.DAT1
SDIO_DAT2
  Top 0.2: STM32F0401.51 46.75,52.8 45.71,51.76 45.71,51.01 44.85,50.15 R2.1 44.85,46.55 47.5,43.9 MICROSD.DAT2
SDIO_DAT3
  Top 0.2: MICROSD.DAT3 51.8,42.8 52.47,43.47 52.47,47.05 R7.1 52.1,47.15 48.35,47.15 46.21,49.29 46.21,51.19 47.25,52.23 STM32F0401.52
SP+  (via drill 0.35)
  Top 0.5: U$1.IN-2 9,24.9 v9,23
  Bottom 0.5: R1.1 16.69,38.39 C1.1 | D1.A 9,28.9 v9,23 9,32.5 14.64,38.14 C1.1 | JP1.2 16.44,42.33 C1.1
SP+-  (via drill 0.35)  (1 unrouted)
  Top 0.5: U$7.1 10.5,38 v14.8,33.7
  Bottom 0.5: PWR.C 18.28,35.34 C1.2 v14.8,33.7 13.95,32.85 U$4.OUT-21 | U$4.OUT-21 9.95,17 D4.C | U$4.OUT-21 13.95,16.55 16.17,14.33 SP-OUT.1
SP-  (via drill 0.35)
  Top 0.5: SP-OUT.2 10.1,1.9 v8,4 | v1.5,23 1.5,34 9.5,42 U$7.2 9.5,44.35 11.59,44.35 12.44,43.5 JP1.1
  Bottom 0.5: v8,4 1.5,10.5 v1.5,23
  pour Top: -0.4,46.2 30.3,46.2 30.3,-0.2 -0.4,-0.2
  pour Bottom: -0.9,46.7 30.7,46.7 30.7,-0.7 -0.9,-0.7
SVC  (via drill 0.35)
  Top 0.2: R6.1 45.75,52.7 STM32F0401.49 45.75,54.75 46,55 53.58,55 54.24,54.34 55.69,54.34 v55.93,54.58
  Bottom 0.2: v55.93,54.58 56.63,53.88 56.63,39.21 61.07,34.78 81.4,34.78 83.33,36.71 JP2.4
SVD  (via drill 0.35)
  Top 0.2: R5.1 41.7,56.75 STM32F0401.46 44.82,56.75 46.17,55.4 54.18,55.4 54.56,55.02 v54.82,55.02
  Bottom 0.2: v54.82,55.02 54.82,54.73 56.23,53.32 56.23,39.05 60.9,34.38 83.25,34.38 JP2.3
TCXO
  Top 0.2: STM32F0401.5 61.25,57.75 61.5,58 61.5,63.15 C9.1
UOR
  Top 0.2: ESP32-CAM.P$14 76.6,32.05 93.44,32.05 94.05,31.43 94.05,11.56 91.3,8.82 79.13,8.82 JP4.5
UOT
  Top 0.2: ESP32-CAM.P$15 74.46,31.65 93.27,31.65 93.65,31.27 93.65,11.73 91.14,9.22 76.99,9.22 JP4.4
V_BAT  (via drill 0.35)
  Top 0.2: BAT_PWR.A 103.22,62.78
  Top 0.5: DC-DC_5V.P$1 DC-DC_5V.P$2 | DC-DC-3V3.P$2 DC-DC-3V3.P$1 108.27,57.73 103.22,62.78 101.75,64.25 | v52.52,70.13 52.52,70.27 55.56,73.31 92.69,73.31 101.75,64.25 | S1.P$3 101.75,64.25
  Bottom 0.5: v52.52,70.13 50.96,70.13 49.37,68.54 49.37,63.81 50.77,62.41 50.77,59.62 48.22,57.06 42.78,57.06 36.52,50.8 36.52,49.7 37.73,48.49 DC-DC_5V.P$1

## Text on the board
bPlace: V_BAT | GND
tNames: SPout | - | + | 3V3 | GND | SVC | SVD | DTX | DRX | KO | GND | 5V | GESP | IO2 | UOT | UOR | OI0 | - | + | SPin